# EAGLE board Metro Mini PCB (EAGLE 9.7.0)
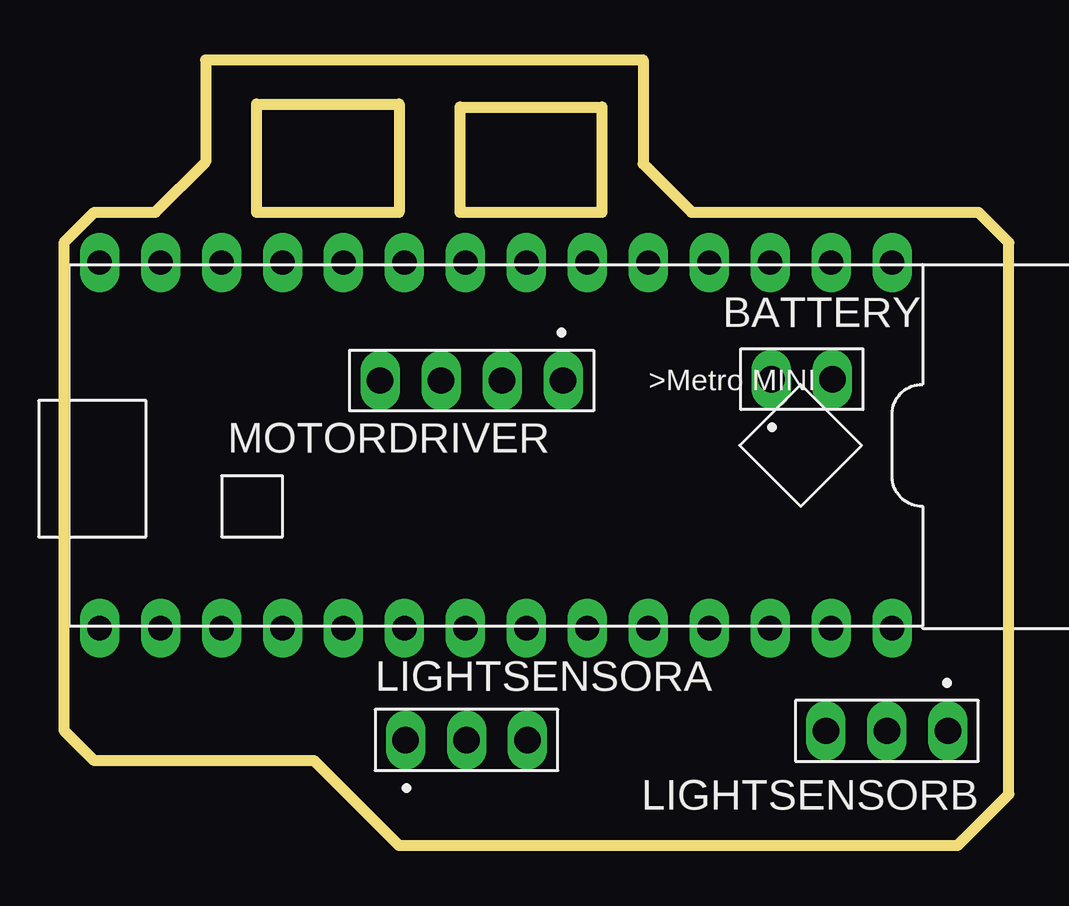
[diagram p0: board, top side]
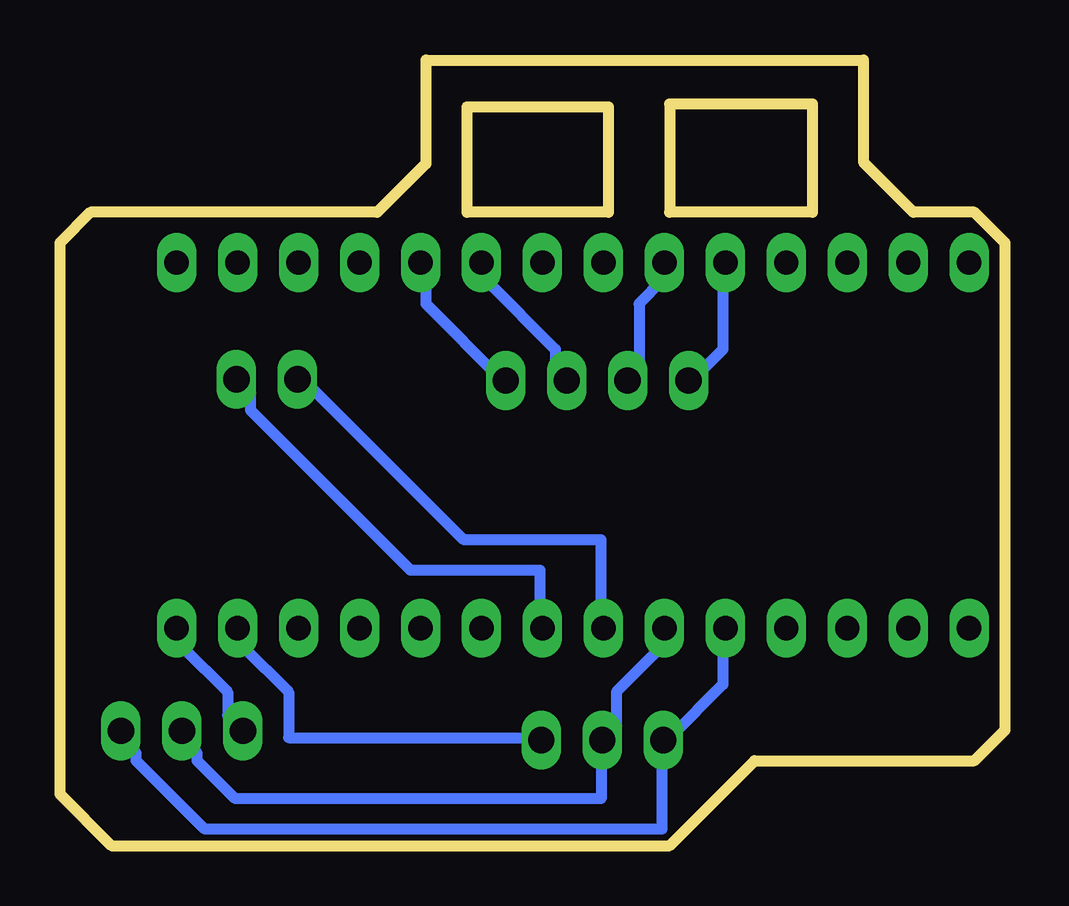
[diagram p1: board, bottom side, seen from below]

Size 39.37 x 32.76 mm. Coordinates in mm from the lower left corner, seen from the top.
Outline: 10.42,3.55 1.27,3.55 0,4.82 0,25.14 1.27,26.41 3.81,26.41 5.9,28.5 5.9,32.76 24.13,32.76 24.13,28.43 26.16,26.41 38.1,26.41 39.37,25.14 39.37,2.14 37.22,0 13.97,0 10.42,3.55
Outline: 8.02,26.41 13.97,26.41 13.97,30.92 8.02,30.92 8.02,26.41
Outline: 16.51,26.41 22.42,26.41 22.42,30.79 16.51,30.79 16.51,26.41
Copper layers (1*16): Top / Bottom
Stack-up Default Layer Stack: Top User Defined 0.035mm / Dielectric-1 User Defined 1.5mm / Bottom User Defined 0.035mm
Design rules "OthermillDRC_1_32_v2": minimum track width 8mil, minimum drill 0.8mm, track to track 0.794003125mm, track to pad 0.794003125mm, pad to pad 0.794003125mm, via to via 0.794003125mm, smd to smd 0mil, copper to edge 0mil, drill to drill 1mil, minimum pad ring 10mil, minimum via ring 10mil, stop-mask expansion 1mil, vias tented up to drill 30mil, thermal gap 10mil
Net classes: 0 default: width 0.457 mm, drill 1.524 mm, clearance 0.381 mm

## Footprints (pad centres in the part's own frame; a part is rotated, then mirrored left to right if it is on the bottom)
61300211121 = drill 1.1 long: 1 -1.27,0; 2 1.27,0
61300311121 = drill 1.1 long: 1 -2.54,0; 2 0,0; 3 2.54,0
61300411121 = drill 1.1 long: 1 -3.81,0; 2 -1.27,0; 3 1.27,0; 4 3.81,0
METROMINI = drill 1.016 pad 1.651 long: 0 -15.24,-5.08; 1 -12.7,-5.08; 2 -10.16,-5.08; 3 -7.62,-5.08; 3.3V 12.7,10.16; 4 -5.08,-5.08; 5 -2.54,-5.08; 5V 10.16,10.16; 6 0,-5.08; 7 2.54,-5.08; 8 5.08,-5.08; 9 7.62,-5.08; 10 10.16,-5.08; 11 12.7,-5.08; 12 15.24,-5.08; 13 17.78,-5.08; A0 -2.54,10.16; A1 -5.08,10.16; A2 -7.62,10.16; A3 -10.16,10.16; A4 -12.7,10.16; A5 -15.24,10.16; AREF 0,10.16; GND 5.08,10.16; GND2 7.62,10.16; RST 15.24,10.16; USB 17.78,10.16; VIN 2.54,10.16

## Placement (x,y rotation side)
BATTERY  61300211121  [61300211121]  30.75,19.45 0 top
LIGHTSENSORA  61300311121  [61300311121]  16.78,4.41 0 top
LIGHTSENSORB  61300311121  [61300311121]  34.29,4.79 180 top
MOTORDRIVER  61300411121  [61300411121]  16.99,19.39 180 top
U1  2x14p-2.54  [METROMINI]  19.27,19.23 180 top

## Library data of the parts
BATTERY = Neslete kluibrary; CREATED_BY: PCBLayout.com; DIGI_KEY_PART_NUMBER: 732-5315-ND; MANUFACTURER: Wurth Electronics Inc.; MPN: 61300211121
LIGHTSENSORA LIGHTSENSORB = Neslete kluibrary; CREATED_BY: PCBLayout.com; DIGI_KEY_PART_NUMBER: 732-5316-ND; MANUFACTURER: Wurth Electronics Inc.; MPN: 61300311121
MOTORDRIVER = Neslete kluibrary; CREATED_BY: PCBLayout.com; DIGI_KEY_PART_NUMBER: 732-5317-ND; MANUFACTURER: Wurth Electronics Inc.; MPN: 61300411121
U1 = ROBOTICS library v1; MPN: ICX-28P

## Nets
N$1: MOTORDRIVER.1 U1.4
N$2: MOTORDRIVER.2 U1.5
N$3: MOTORDRIVER.3 U1.8
N$4: MOTORDRIVER.4 U1.9
N$5: LIGHTSENSORA.1 LIGHTSENSORB.1 U1.GND2
N$6: LIGHTSENSORA.2 LIGHTSENSORB.2 U1.GND
N$7: LIGHTSENSORA.3 U1.A4
N$8: LIGHTSENSORB.3 U1.A5
N$9: BATTERY.2 U1.AREF
N$10: BATTERY.1 U1.VIN

## Tracks (layer width: path | path; a pad name or v marks a point on that pad's centre or on a via)
N$1
  Bottom 0.457: MOTORDRIVER.1 20.95,19.42 24.13,22.6 24.13,24.18 U1.4
N$2
  Bottom 0.457: MOTORDRIVER.2 18.41,19.42 18.73,19.74 18.73,20.69 21.59,23.55 21.59,24.18 U1.5
N$3
  Bottom 0.457: MOTORDRIVER.3 15.56,19.42 15.24,19.74 15.24,22.6 14.29,23.55 14.29,24.18 U1.8
N$4
  Bottom 0.457: MOTORDRIVER.4 13.02,19.42 11.75,20.69 11.75,24.18 U1.9
N$5
  Bottom 0.457: U1.GND2 11.75,8.94 11.75,6.72 13.97,4.5 LIGHTSENSORA.1 14.29,4.18 14.29,0.69 33.34,0.69 36.19,3.55 36.19,3.86 36.83,4.5 LIGHTSENSORB.1
N$6
  Bottom 0.457: U1.GND 14.29,8.94 14.29,8.31 16.19,6.4 16.19,4.82 16.51,4.5 LIGHTSENSORA.2 16.83,4.18 16.83,1.96 32.07,1.96 33.66,3.55 33.66,3.86 34.29,4.5 LIGHTSENSORB.2
N$7
  Bottom 0.457: LIGHTSENSORA.3 19.37,4.5 29.84,4.5 29.84,6.4 31.75,8.31 31.75,8.94 U1.A4
N$8
  Bottom 0.457: LIGHTSENSORB.3 31.75,4.82 32.38,5.45 32.38,6.4 34.29,8.31 34.29,8.94 U1.A5
N$9
  Bottom 0.457: BATTERY.2 31.75,19.42 31.43,19.1 31.43,18.15 24.77,11.48 19.37,11.48 19.37,9.26 U1.AREF
N$10
  Bottom 0.457: BATTERY.1 29.21,19.42 22.54,12.75 16.83,12.75 16.83,9.26 U1.VIN